# Allegro board AC_CONTROLLER.brd
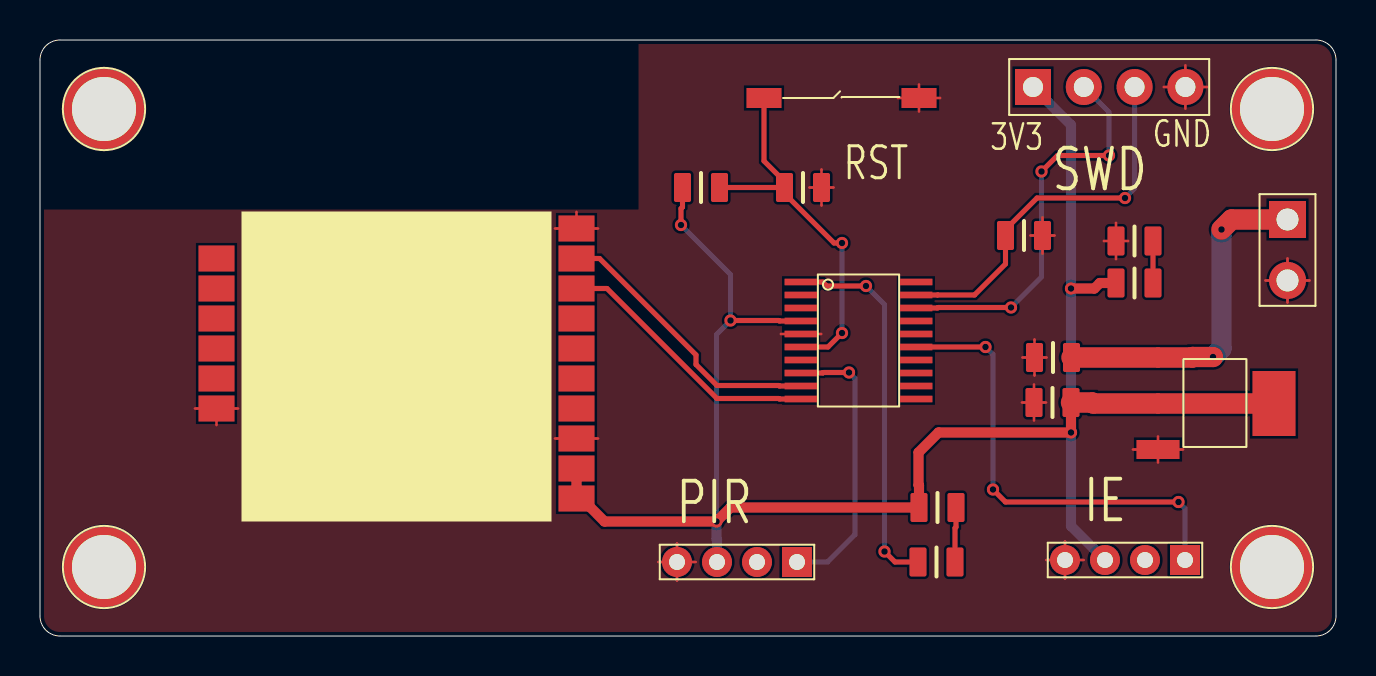
[diagram p0: board, top side]
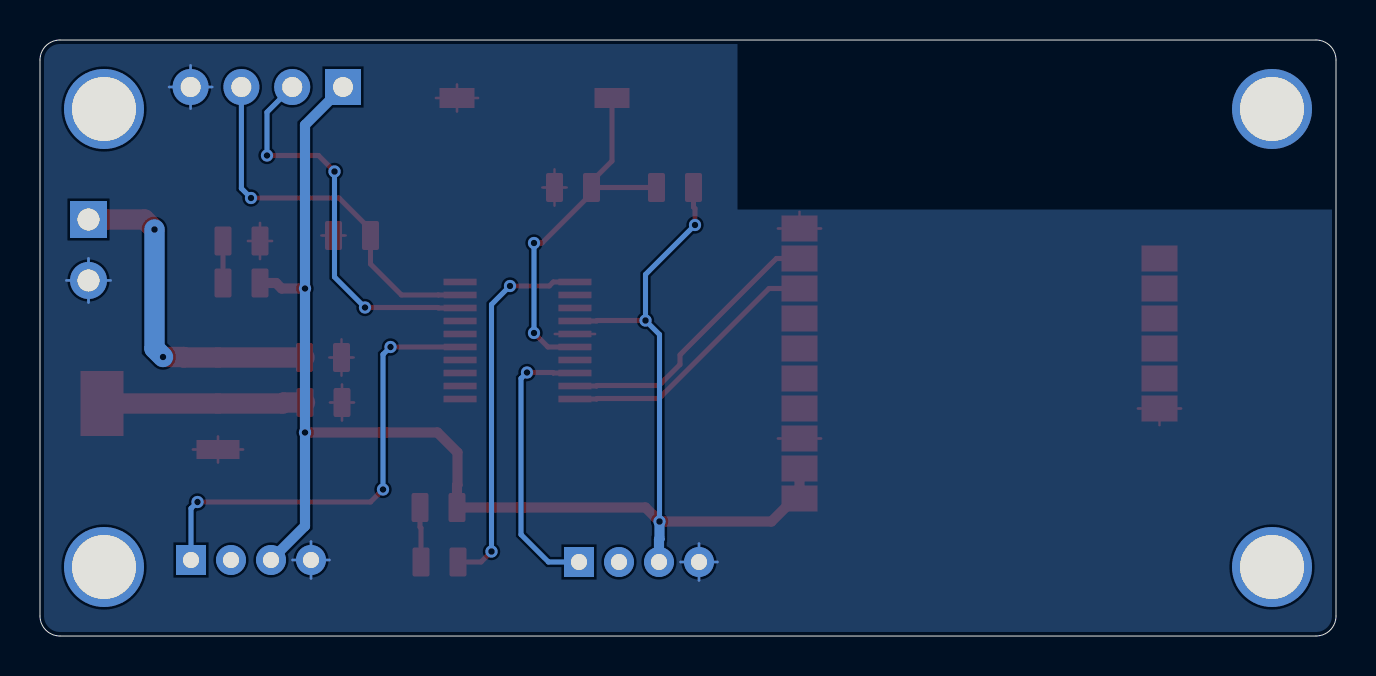
[diagram p1: board, bottom side, seen from below]

Outline 64.8 x 29.8 mm; copper layers: TOP, BOTTOM. Coordinates in mm from the lower left corner of the outline.
Outline path: 0,28.8 0,1 arc(0.29,0.29) 1,0 63.8,0 arc(64.51,0.29) 64.8,1 64.8,28.8 arc(64.51,29.51) 63.8,29.8 1,29.8 arc(0.29,29.51) 0,28.8

## Placement (name value [footprint] x y rotation side)
A1  AMS1117_3V3  [LM1117_3_3]  55.9 9.32 0 top
C1  22uF  [C-0805]  50.62 11.68 180 top
C2  10uF  [C-0805]  50.65 13.93 180 top
C3  1uF  [C-0805]  38.15 22.43 0 top
D1  BLINK_LED  [C-0805]  44.83 3.7 0 top
D2  PWR_LED  [C-0805]  54.72 19.75 0 top
J1  POWER  [CON2_R2_54]  62.38 20.82 0 top
J2  CON4  [CON4_2MM]  34.85 3.7 180 top
J3  CON4  [CON4_2MM]  54.25 3.8 180 top
J4  SWD  [CON4]  49.65 27.45 90 top
K1  KEY2  [3_6KEY]  40.07 26.9 0 top
R1  3K  [C-0805]  44.88 6.43 0 top
R2  3K  [C-0805]  54.72 17.65 0 top
R3  10K  [C-0805]  49.2 20.02 0 top
R4  10K  [C-0805]  33.05 22.43 0 top
REF  -  [unnamed]  3.2 26.35 0 top
REF#2  -  [unnamed]  61.6 3.45 0 top
REF#3  -  [unnamed]  61.6 26.35 0 top
REF#4  -  [unnamed]  3.2 3.45 0 top
T1  STM32G030F6P6  [TSSOP20]  40.92 14.78 0 top
Z1  Zigbee  [DL-LN33]  8.82 5.72 0 top

## Library data of the parts
A1 = AMS1117_3V3
C1-C3 = CAP NP: Tolerance: RichardLC; User Part Number: pn
D1 D2 = LED: Tolerance: RichardLC; User Part Number: pn
J1 = CON2
J2-J4 = CON4
K1 = KEY2
R1-R4 = R: Tolerance: RichardLC; User Part Number: pn
T1 = STM32G030F6P6: Tolerance: ***; User Part Number: ***
Z1 = Zigbee

## Footprints (pads in the part's own frame, mm; a bottom-side part is the same pattern mirrored in y, then rotated)
3_6KEY
  rect 1.75x1 smd: 1(-3.875,0) 2(3.875,0)
C-0805
  custom 0.848x1.448 smd: 1(-0.925,0) 2(0.925,0)
CON2_R2_54
  rect 1.849x1.849 hole 1.1: 1(0,0)
  round 1.849 hole 1.1: 2(0,-3.048)
CON4
  rect 1.8x1.8 hole 1: 1(0,0)
  round 1.8 hole 1: 2(0,-2.54) 3(0,-5.08) 4(0,-7.62)
CON4_2MM
  rect 1.5x1.5 hole 0.8: 1(-3,0)
  round 1.5 hole 0.8: 2(-1,0) 3(1,0) 4(3,0)
DL-LN33
  rect 1.8x1.3 smd: 1(0,13.15) 2(0,11.65) 3(0,10.15) 4(0,8.65) 5(0,7.15) 6(0,5.65) 7(18,1.15) 8(18,2.65) 9(18,4.15) 10(18,5.65) 11(18,7.15) 12(18,8.65) 13(18,10.15) 14(18,11.65) 15(18,13.15) 16(18,14.65)
LM1117_3_3
  rect 2.15x0.95 smd: 1(0,0) 2(0,2.3) 3(0,4.6)
  rect 2.15x3.25 smd: 4(5.8,2.3)
TSSOP20
  rect 1.651x0.33 smd: 1(-2.87,2.926) 2(-2.87,2.276) 3(-2.87,1.626) 4(-2.87,0.975) 5(-2.87,0.325) 6(-2.87,-0.325) 7(-2.87,-0.975) 8(-2.87,-1.626) 9(-2.87,-2.276) 10(-2.87,-2.926) 11(2.87,-2.926) 12(2.87,-2.276) 13(2.87,-1.626) 14(2.87,-0.975) 15(2.87,-0.325) 16(2.87,0.325) 17(2.87,0.975) 18(2.87,1.626) 19(2.87,2.276) 20(2.87,2.926)
unnamed
  round 4 hole 3.2: (0,0)

## Nets
3V3: A1.2(3V3_1) A1.4(3V3_2) C1.1 J2.3 J3.3 J4.1 R1.1 R2.1 R4.1 T1.4(VDD/VDDA) Z1.7(VCC1) Z1.8(VCC2)
GND: A1.1(GND) C1.2 C2.2 C3.2 D2.1(CATHODE) J1.2 J2.4 J3.4 J4.4 K1.2 R3.2 T1.5(VSS/VSSA) Z1.6(GND1) Z1.9(GND2) Z1.16(GND3)
VIN: A1.3(VIN) C2.1 J1.1
BOOT0: J4.3 R3.1 T1.19(PA15/PA14-BOOT0)
IE_SIG: J3.1 T1.15(PB0/PB1/PB2/PA8)
LED: D1.1(CATHODE) T1.1(PB7/PB8)
MCU_RX: T1.10(PA3) Z1.14(TX)
MCU_TX: T1.9(PA2) Z1.15(RX)
PIR_SIG: J2.1 T1.8(PA1)
RST: C3.1 K1.1 R4.2 T1.6(NRST)
SWDIO: J4.2 T1.18(PA13)
N01786: D1.2(ANODE) R1.2
N01951: D2.2(ANODE) R2.2

Pads without a net: J2 2; J3 2; T1 2 3 7 11 12 13 14 16 17 20; Z1 1 2 3 4 5 10 11 12 13

## Via types
v1: diameter 0.61, hole 0.33, TOP to BOTTOM, 19 vias

## Routing (per net, layer and track width the routed paths; a pad name or vN(x,y) marks a point on that pad's centre or on a via; arc(x,y) is an arc through that point)
3V3: length 93
  TOP w0.254: R4.1 32.12,21.45 32.05,21.37 v1(32.05,20.55) ; v1(34.52,15.78) 36.95,15.78 36.98,15.75 T1.4
  TOP w0.508: C1.1 v1(51.55,10.18) 44.92,10.18 43.92,9.18 43.92,7.56 43.95,7.53 R1.1 34.52,6.43 v1(33.82,5.72) 28.22,5.72 27.07,6.88 26.82,6.88 26.82,8.38 ; v1(51.55,17.38) 52.72,17.38 52.99,17.65 R2.1
  TOP w1.016: A1.4 A1.2 52.66,11.62 52.61,11.68 C1.1
  BOTTOM w0.254: v1(33.82,5.72) 33.82,15.08 v1(34.52,15.78) 34.52,18.07 v1(32.05,20.55)
  BOTTOM w0.508: J4.1 51.55,25.55 v1(51.55,17.38) v1(51.55,10.18) 51.55,5.5 J3.3 ; v1(33.82,5.72) 33.82,4.86 33.85,4.83 J2.3
GND: length 64.9
  TOP w0.127: J4.4 58.35,27.45 ; J4.4 57.27,28.53 ; J4.4 56.19,27.45 ; J4.4 57.27,26.37 ; 8.82,11.38 9.9,11.38 ; 8.82,11.38 8.82,10.54 ; 8.82,11.38 7.74,11.38 ; 49.72,13.93 49.72,14.83 ; 49.72,13.93 49.12,13.93 ; 49.72,13.93 49.72,13.02 ; 49.72,13.93 50.33,13.93 ; R3.2 50.73,20.02 ; R3.2 49.52,20.02 ; R3.2 50.12,20.93 ; R3.2 50.12,19.12 ; 49.1,11.68 C1.2 ; C1.2 50.3,11.68 ; C1.2 49.7,10.77 ; C1.2 49.7,12.58 ; 39.06,15.1 T1.5 37.05,15.1 ; D2.1 54.4,19.75 ; D2.1 53.2,19.75 ; D2.1 53.8,20.65 ; D2.1 53.8,18.85 ; 54.64,9.32 A1.1 ; A1.1 57.16,9.32 ; A1.1 55.9,8.67 ; A1.1 55.9,9.98 ; 61.27,17.78 J1.2 ; J1.2 63.48,17.78 ; J1.2 62.38,16.67 ; J1.2 62.38,18.88 ; 31.85,2.77 J2.4 ; J2.4 30.92,3.7 ; J2.4 31.85,4.63 ; J2.4 32.78,3.7 ; 38.47,22.43 C3.2 ; C3.2 39.07,21.52 ; C3.2 39.07,23.33 ; C3.2 39.68,22.43 ; J3.4 52.18,3.8 ; J3.4 51.25,4.73 ; J3.4 50.32,3.8 ; J3.4 51.25,2.87 ; 26.82,20.38 27.9,20.38 ; 26.82,20.38 25.74,20.38 ; 26.82,20.38 26.82,21.2 ; 42.89,26.9 K1.2 ; K1.2 45,26.9 ; K1.2 43.95,27.58 ; K1.2 43.95,26.22 ; 25.74,9.88 27.9,9.88
  BOTTOM w0.127: J1.2 62.38,18.88 ; J1.2 61.27,17.78 ; J1.2 62.38,16.67 ; J1.2 63.48,17.78 ; 30.92,3.7 J2.4 ; J2.4 31.85,4.63 ; J2.4 31.85,2.77 ; J2.4 32.78,3.7 ; J3.4 51.25,4.73 ; J3.4 51.25,2.87 ; J3.4 52.18,3.8 ; J3.4 50.32,3.8 ; J4.4 57.27,28.53 ; J4.4 57.27,26.37 ; J4.4 58.35,27.45 ; J4.4 56.19,27.45
VIN: length 17.1
  TOP w1.016: J1.1 59.58,20.82 v1(59.08,20.32) ; C2.1 A1.3 57.61,13.93 57.64,13.95 v1(58.65,13.95)
  BOTTOM w1.016: v1(59.08,20.32) 59.08,14.38 v1(58.65,13.95)
BOOT0: length 19.2
  TOP w0.254: T1.19 44.88,17.05 44.88,17.05 46.72,17.05 48.27,18.6 R3.1 48.27,20.32 49.85,21.9 v1(54.25,21.9)
  BOTTOM w0.254: J4.3 54.73,22.38 v1(54.25,21.9)
IE_SIG: length 23.3
  TOP w0.254: v1(47.27,14.45) T1.15 ; v1(56.92,6.7) 48.27,6.7 v1(47.65,7.33)
  BOTTOM w0.254: v1(47.65,7.33) 47.65,14.08 v1(47.27,14.45) ; v1(56.92,6.7) 57.25,6.38 J3.1
LED: length 18.9
  TOP w0.254: T1.1 39.13,17.7 39.34,17.5 v1(41.3,17.5) ; v1(42.22,4.22) 42.75,3.7 D1.1
  BOTTOM w0.254: v1(42.22,4.22) 42.22,16.57 v1(41.3,17.5)
MCU_RX: length 13.5
  TOP w0.254: T1.10 36.98,11.85 36.95,11.88 33.85,11.88 28.35,17.38 26.82,17.38
MCU_TX: length 14.2
  TOP w0.254: 26.82,18.88 27.98,18.88 32.8,14.05 32.8,13.58 33.85,12.53 36.95,12.53 36.98,12.5 T1.9
PIR_SIG: length 14.1
  TOP w0.254: T1.8 39.13,13.15 39.16,13.18 v1(40.45,13.18)
  BOTTOM w0.254: v1(40.45,13.18) 40.75,12.88 40.75,5.08 39.38,3.7 J2.1
RST: length 19.2
  TOP w0.254: T1.6 39.4,14.45 v1(40.1,15.15) ; R4.2 C3.1 ; C3.1 37.23,22.73 36.2,23.75 K1.1 ; C3.1 37.23,22.12 39.7,19.65 v1(40.1,19.65)
  BOTTOM w0.254: v1(40.1,19.65) v1(40.1,15.15)
SWDIO: length 19.8
  TOP w0.254: v1(48.55,16.43) 44.9,16.43 44.88,16.4 T1.18 ; v1(50.08,23.23) 50.88,24.02 v1(53.45,24.02)
  BOTTOM w0.254: J4.2 53.45,26.19 v1(53.45,24.02) ; v1(50.08,23.23) 50.08,17.95 v1(48.55,16.43)
N01786: length 2.7
  TOP w0.254: D1.2 45.75,5.4 45.8,5.45 R1.2
N01951: length 2.1
  TOP w0.254: R2.2 D2.2

## Copper pours and planes (outline as drawn; the poured copper is in the pictures)
GND on TOP: 1,0.2 0.43,0.43 0.2,1 0.2,21.32 29.92,21.32 29.92,29.6 63.8,29.6 64.37,29.37 64.6,28.8 64.6,1 64.37,0.43 63.8,0.2 ; 2 cut-outs
GND on BOTTOM: 1,0.2 0.43,0.43 0.2,1 0.2,21.32 29.92,21.32 29.92,29.6 63.8,29.6 64.37,29.37 64.6,28.8 64.6,1 64.37,0.43 63.8,0.2

## Text on the board
Ref Des/Silkscreen Top: 3V3 | GND | RST | PIR | SWD | IE
COMPVAL_TYPE_TOP: FIGURE | SIZE | 0.33 | 0.8 | 1.0 | 1.1 | 3.2 | DRILL CHART: TOP to BOTTOM | ALL UNITS ARE IN MILLIMETERS | PLATED | QTY | 19 | 8 | 4 | 2
